# Altium PCB ShieldBoard.PcbDoc
Units mil, origin at the board's own origin, x right, y up, seen from the top; angles counter-clockwise.
Board outline 2700 x 2100 mil, 2 copper layers (Top Layer, Bottom Layer), stack 62.8 mil thick; 15 components, 27 nets, 62 pads, 20 vias.
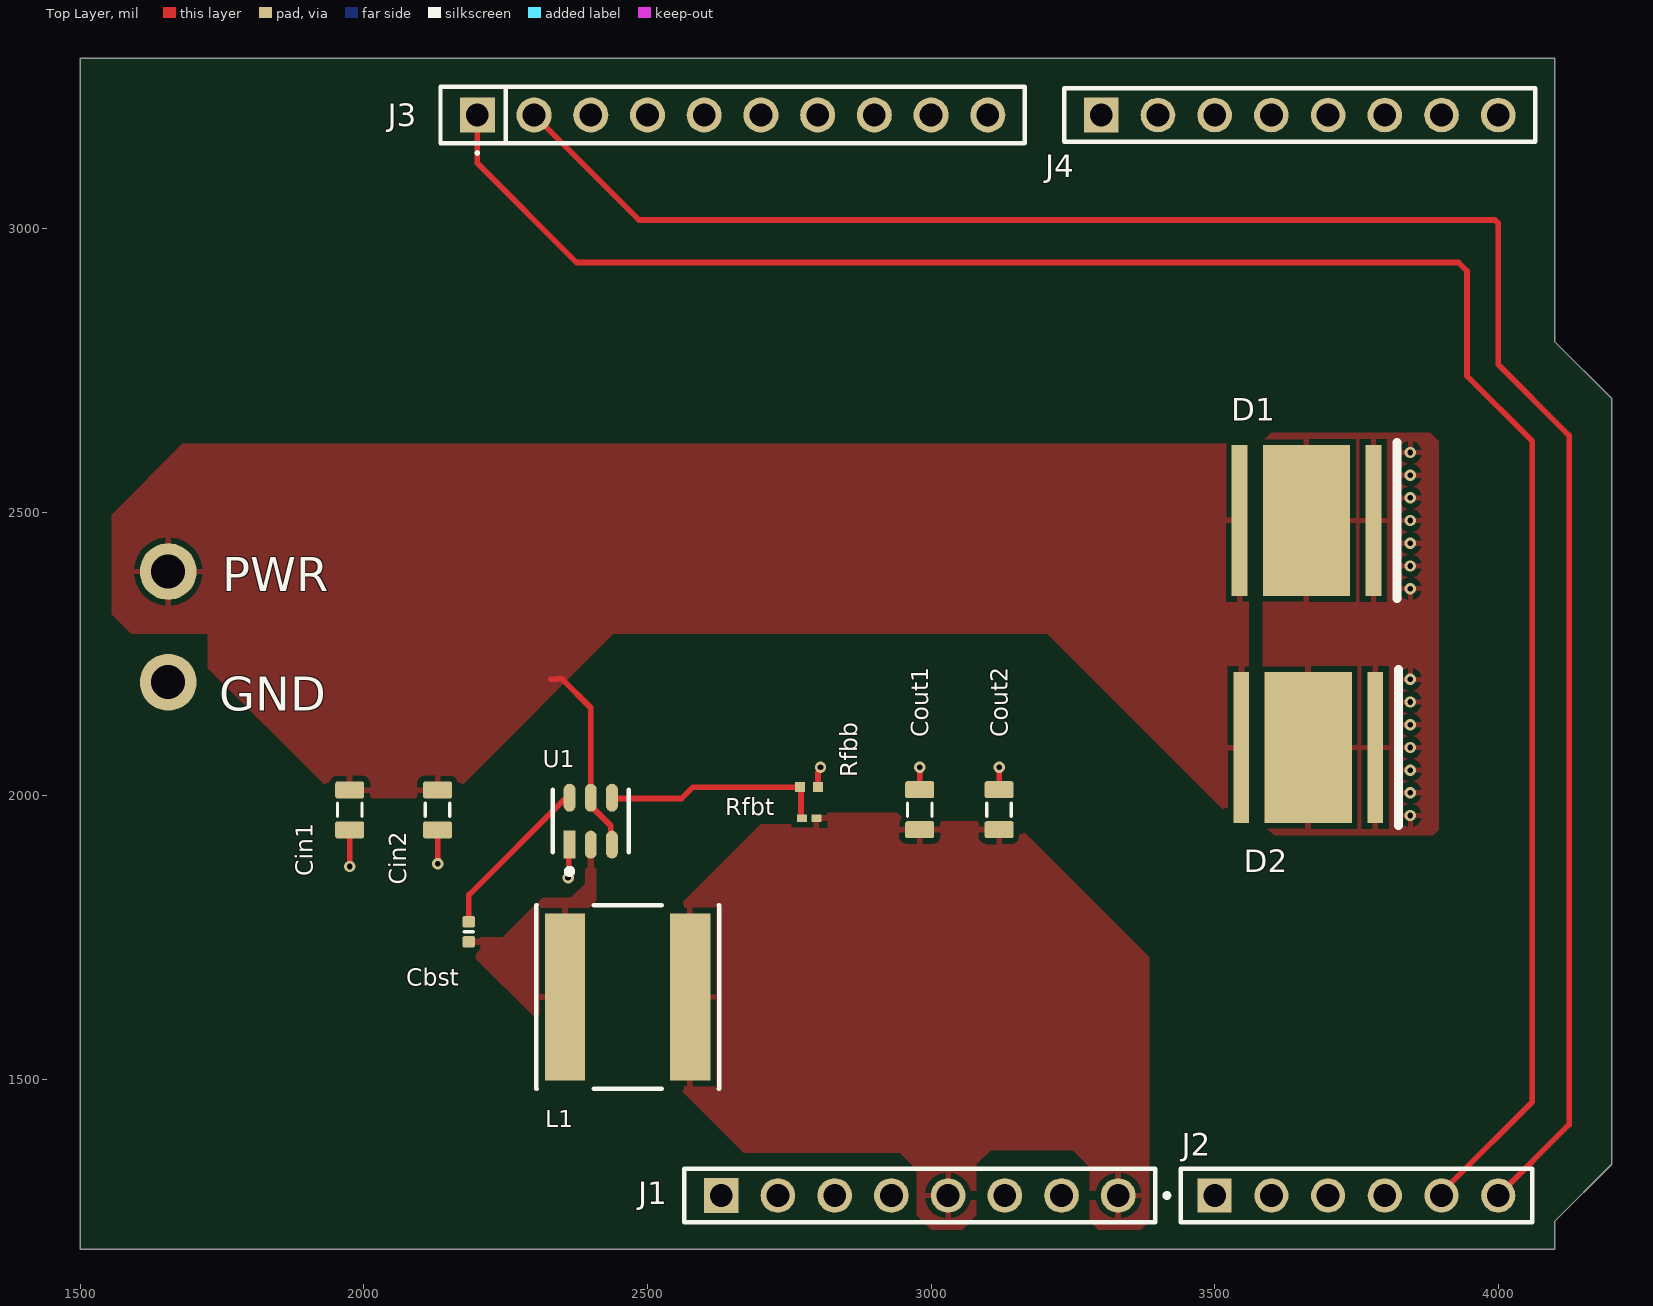
[diagram p0: Top Layer view]
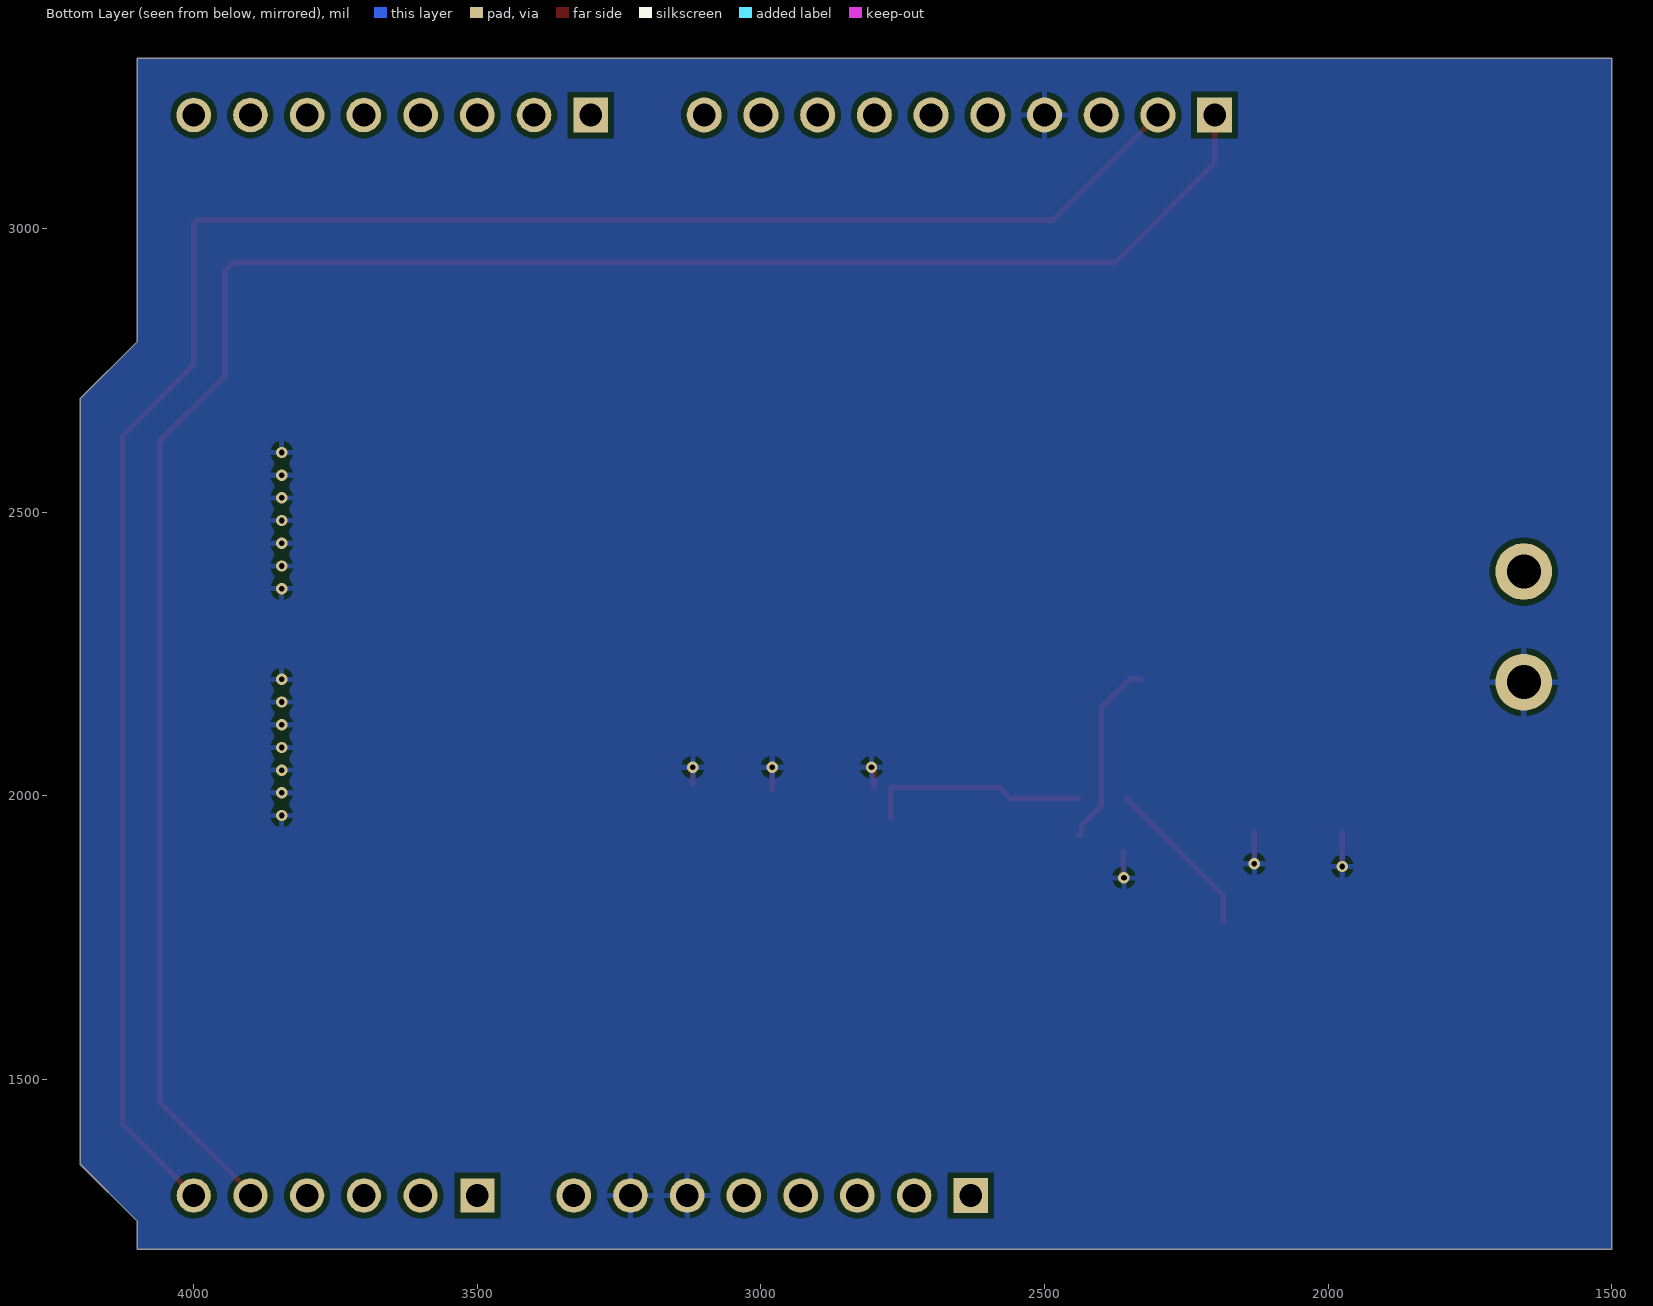
[diagram p1: Bottom Layer view, seen from below]
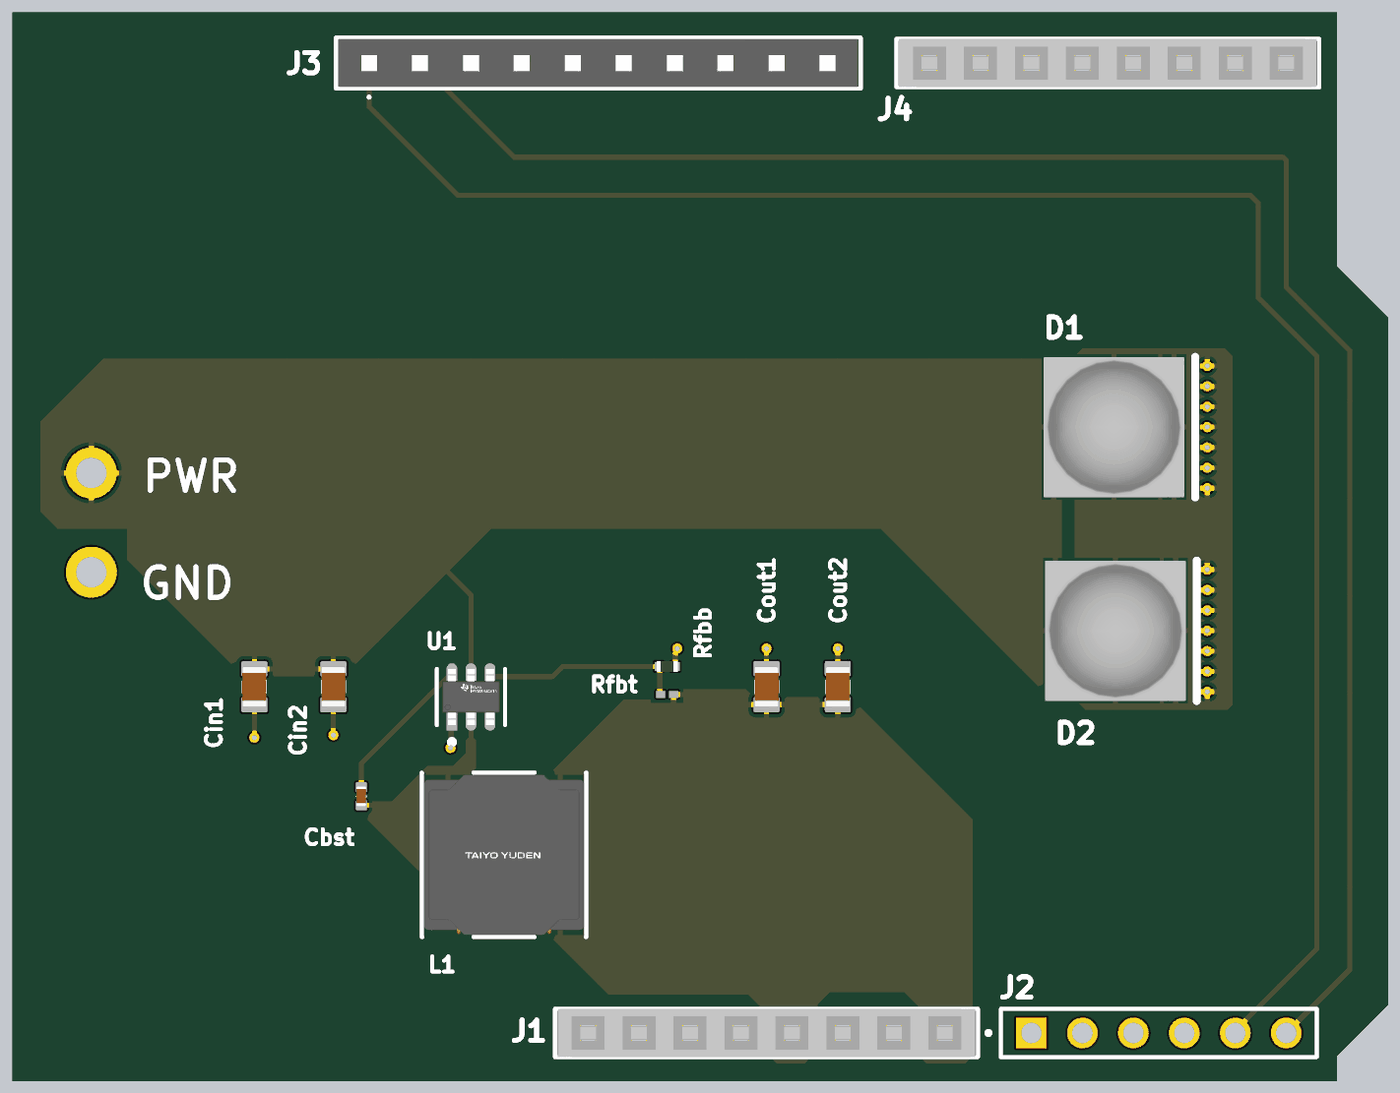
[diagram p2: 3D render of the assembled board from above, using the file's embedded part models]

## Layer stack, top to bottom
Top Solder: solder mask 0.4, Solder Resist, Dk 3.5
Top Layer: signal copper 1.4
Dielectric 1: dielectric 60, FR-4, Dk 4.8
Bottom Layer: signal copper 1.4
Bottom Solder: solder mask 0.4, Solder Resist, Dk 3.5

## Board outline
1500,1200 1500,3300 4100,3300 4100,2800 4200,2700 4200,1350 4100,1250 4100,1200

## Design rules (kind name [scope] priority, off if disabled: settings)
Clearance [All] p1: gap=10 ignorepadtopadclearanceinfootprint=TRUE
MinimumSolderMaskSliver [All] p1: minsoldermaskwidth=5
PolygonConnect [All] p1: connectstyle=Relief reliefconductorwidth=10 reliefentries=4 polygonreliefangle="90 Angle" airgapwidth=10
RoutingVias [All] p1: holewidth=10 width=18 viastyle="Through Hole" minholewidth=6 minwidth=14 maxholewidth=28 maxwidth=50
SilkToSolderMaskClearance [IsPad] p1: minsilkscreentomaskgap=0 clearancetoexposedcopper=TRUE
SolderMaskExpansion [All] p1: expansion=4 istentingtop=FALSE
SupplyNets "Schematic Supply Nets_2" [InNet('+5V')] p1: voltage=0.000
SupplyNets "Schematic Supply Nets_1" [InNet('GND')] p2: voltage=0.000
SupplyNets "Schematic Supply Nets" [InNet('+12V')] p3: voltage=0.000
Width [All] p1: maxlimit=10 minlimit=10 preferedwidth=10
28 further rules are at their usual default settings.

## Components (designator, comment, footprint, x,y, rotation, side; value= is the part's Value field where it differs from the comment)
Cbst "Capacitor 100nF +/-20% 50V 0402" CAPC0402(1005)60_L 2185,1760 r270 top value=100nF
Cin1 "Capacitor 10µF +/-20% 25V 0805" CAPC0805(2012)145_L 1975,1975 r90 top value=10µF
Cin2 "Capacitor 10µF +/-20% 25V 0805" CAPC0805(2012)145_L 2130,1975 r90 top value=10µF
Cout1 "Capacitor 22µF +/-40% 16V 0805" CAPC0805(2012)145_L 2980,1975.04 r270 top value=22µF
Cout2 "Capacitor 22µF +/-40% 16V 0805" CAPC0805(2012)145_L 3120,1975 r270 top value=22µF
D1 "MKRAWT-00-0000-0D0HG235H" CREE-MK-R-2_V 3661.89,2485 r0 top
D2 "MKRAWT-00-0000-0D0HG235H" CREE-MK-R-2_V 3665,2085 r0 top
J1 "SSQ-108-01-G-S" SMTC-SSQ-108-01-X-S 2630,1295 r0 top
J2 "SSQ-106-03-X-S" SAMTEC_SSQ-106-03-X-S 3750,1295 r180 top
J3 "SSQ-110-03-T-S" FP-SSQ-110-03-T-S-MFG 2650,3200 r0 top
J4 "SSQ-108-01-G-S" SMTC-SSQ-108-01-X-S 3300,3200 r0 top
L1 "3.3uH" FP-NRS8030-MFG 2465,1645 r0 top
Rfbb "10kOhm" RESC1005X40X25LL05T05 2785,2015 r180 top
Rfbt "56.2kOhm" RESC0603X28X15NL05T05 2785,1960 r0 top
U1 "TPS562201DDCR" FP-DDC0006A-IPC_C 2400,1955 r90 top

## Footprints (in the part's own frame and the unit in brackets; to place one, negate y for a bottom-side part, rotate by r counter-clockwise, add the part's x,y. Pads: shape width x height; smd on the part's side, far side on the other; paste and mask are expansions set on the pad)
CAPC0402(1005)60_L [mm] "Chip Capacitor, Body 1.0x0.5mm, Height 0.6mm, IPC High Density"
  rrect25% 0.5x0.55 smd: 1(-0.45,0) 2(0.45,0)
  silkscreen extent 0,-0.2 0,0.2, body extent -0.5,-0.25 0.5,0.25, height 0.6
CAPC0805(2012)145_L [mm] "Chip Capacitor, Body 2.0x1.2mm, Height 1.45mm, IPC High Density"
  rrect25% 0.76x1.3 smd: 1(-0.9,0) 2(0.89,0)
  silkscreen extent -0.3,-0.55 0.3,0.55, body extent -1,-0.6 1,0.6, height 1.45
CREE-MK-R-2_V [mm] "SMD, 2-Leads, Body 7x7mm, Thermal Pad 3.9x6.76mm"
  rect 0.7x6.76 smd: 1(-3,0) 2(3,0)
  rect 3.9x6.76 smd: 3(0,0)
  silkscreen extent 4.05,-3.5 4.05,3.5, body extent -3.5,-3.5 3.5,3.5, height 4.1
FP-DDC0006A-IPC_C [mm]
  rect 1.254x0.532 smd paste+0 mask+0: 1(-1.05,0.95)
  rrect100% 1.254x0.532 smd paste+0 mask+0: 2(-1.05,0) 3(-1.05,-0.95) 4(1.05,-0.95) 5(1.05,0) 6(1.05,0.95)
  silkscreen extent -2.37,-1.7 1.4,1.7, body extent -1.78,-1.55 1.78,1.55, height 0.25
FP-NRS8030-MFG [mm]
  rect 1.8x7.5 smd paste+0 mask+0: 1(-2.8,0) 2(2.8,0)
  silkscreen extent -4.1,-4.1 4.1,4.1, body extent -4.2,-4.2 4.2,4.2, height 0.25
FP-SSQ-110-03-T-S-MFG [mm]
  rect 1.57x1.57 hole 1.02: 1(-11.43,0)
  round 1.57 hole 1.02: 2(-8.89,0) 3(-6.35,0) 4(-3.81,0) 5(-1.27,0) 6(1.27,0) 7(3.81,0) 8(6.35,0) 9(8.89,0) 10(11.43,0)
  silkscreen extent -13.08,-1.76 13.08,1.27, body extent -13.18,-1.37 13.18,1.37, height 0.25
RESC0603X28X15NL05T05 [mm] "Chip Resistor, 2-Leads, Body 0.60x0.30mm, IPC Medium Density"
  rect 0.45x0.35 smd: 1(-0.325,0) 2(0.325,0)
  body extent -0.33,-0.17 0.33,0.18, height 0.28
RESC1005X40X25LL05T05 [mm] "Chip Resistor, 2-Leads, Body 1.05x0.55mm, IPC High Density"
  rect 0.45x0.45 smd: 1(-0.4,0) 2(0.4,0)
  body extent -0.53,-0.28 0.53,0.28, height 0.4
SAMTEC_SSQ-106-03-X-S [mm]
  rect 1.53x1.53 / inner round 1.53 / far side rect 1.53x1.53 hole 1.02: 01(6.35,0)
  round 1.53 hole 1.02: 02(3.81,0) 03(1.27,0) 04(-1.27,0) 05(-3.81,0) 06(-6.35,0)
  silkscreen extent -7.88,-1.2 8.59,1.2
SMTC-SSQ-108-01-X-S [mm] "SQ Post Socket, 1x8 Pins, Vertical, 2.54mm Pitch, Female"
  rect 1.55x1.55 hole 1.02: 1(0,0)
  round 1.55 hole 1.02: 2(2.54,0) 3(5.08,0) 4(7.62,0) 5(10.16,0) 6(12.7,0) 7(15.24,0) 8(17.78,0)
  silkscreen extent -1.65,-1.2 19.43,1.2, body extent -1.52,-1.21 19.3,1.21, height 8.51

## Part data
Cbst: library part CMP-001-00067-3, "Chip Capacitor, 100nF +/-20%, 50V, 0402, Thickness 0.6 mm", Case/Package=0402, Max Operating Temperature=85°C, Min Operating Temperature=-55°C, Tolerance=10%, Voltage Rating=50V, Mounting Technology=SMT, Pins=2
Cin1 Cin2: library part CMP-001-00079-4, "Chip Capacitor, 10µF +/-20%, 25V, 0805, Thickness 1.45 mm", Case/Package=0805, Max Operating Temperature=85°C, Min Operating Temperature=-55°C, Tolerance=10%, Voltage Rating=25V, Mounting Technology=SMT, Pins=2
Cout1 Cout2: library part CMP-001-00081-4, "Chip Capacitor, 22µF +/-40%, 16V, 0805, Thickness 1.45 mm", Case/Package=0805, Max Operating Temperature=85°C, Min Operating Temperature=-55°C, Tolerance=5%, Voltage Rating=16V, Mounting Technology=SMT, Pins=2
D1 D2: library part CMP-2100-00977-1, "LED, White, 12 V, 2-Pin SMD, RoHS, Tape and Reel"
J1 J4: library part CMP-1023-00292-1, "SQ Post Socket, Through-hole, Vertical, -55 to 125 degC, 2.54 mm Pitch, 8-Pin, Female, RoHS", Manufacturer=Samtec, Temperature Range="-55 to 125 degC", ComponentLink1Description="Manufacturer URL", ComponentLink1URL=http://www.samtec.com, ComponentLink2Description=Datasheet, ComponentLink2URL=http://www.samtec.com/documents/webfiles/pdf/SSQ_TH.PDF, ComponentLink3Description="Package Specification", ComponentLink3URL=http://www.samtec.com/documents/webfiles/cpdf/SSQ-1XX-XX-XXX-X-XX-XXX-XX-X-MKT.pdf, DatasheetVersion=F-214, Mounting Technology=Through-hole, Orientation=Vertical, PackageDescription="Assembly, Socket Strip .025[0.64] SQ Tail", PackageReference=SSQ-108-01-X-S, PackageVersion="BD, 6/1987", PartNumber=SSQ-108-01-G-S, Pitch="2.54 mm", RoHS=True
J2: "SSQ - Samtec 2.54mm Square Tail Single Row Socket Strip 8.5mm Profile - Fast Stock", Package=None, Check_prices=https://www.snapeda.com/parts/SSQ-106-03-T-S/Samtec+Inc./view-part/?ref=eda, MF="Samtec Inc.", MP=SSQ-106-03-T-S, SnapEDA_Link=https://www.snapeda.com/parts/SSQ-106-03-T-S/Samtec+Inc./view-part/?ref=snap
J3: library part CMP-00575-00295916-2, "SSQ-110-03-T-S Headers & Wire Housings Tiger Buy Socket Strip with Square Tails, 0.100 Pitch", Color=Black, Current Rating=6.3A, Manufacturer Lifecycle Status=PRODUCTION, Max Operating Temperature=105°C, Min Operating Temperature=-55°C, Voltage Rating=655V, Voltage Rating (AC)=465V, Connector Type="Receptacle, Socket", Contact Material="Nickel, Tin", Contact Plating=Tin, Height=8.64mm, Housing Color=Black, Housing Material=Plastic, Lead Free="Lead Free", Length=25.9mm, Lifecycle Status=Production, Mount="Through Hole", Number of Contacts=10, Number of Pins=10, Number of Positions=10, Number of Rows=1, Packaging=Bulk, Pitch=2.54mm, Radiation Hardening=No, RoHS=Compliant, Termination=Solder, Voltage Rating (DC)=655V, Width=2.41mm
L1: library part CMP-14484-000405-1, "Inductor Power Shielded Wirewound 3.3uH 20% 100KHz Ferrite 4.2A 24.7mΩ DCR T/R", Case/Package=Nonstandard, Current Rating=4.3A, DC Resistance (DCR)=19mR, Inductance Tolerance=20%, Max DC Current=4.2A, Max Operating Temperature=125°C, Min Operating Temperature=-25°C, Package Quantity=1000, Resistor Type=Wirewound, Self Resonant Frequency=50MHz, Test Frequency=100kHz, Core Material=Ferrite, Depth=8.2mm, Halogen Free="Halogen Free", Height=3mm, Height - Seated (Max)=0.118inch, Inductance=3.3uH, Lead Free="Lead Free", Lead Pitch=5.6mm, Length=8mm, Mount="Surface Mount", Number of Pins=2, Packaging="Tape and Reel", Radiation Hardening=No, REACH SVHC="No SVHC", RMS Current (Irms)=4.3A, RoHS Compliant=Yes, Saturation Current=4.2A, Series=NRS, Shielding=Shielded, Termination=SMD/SMT, Tolerance=20%, Width=0.315inch
Rfbb: library part CMP-2000-07588-1, "Chip Resistor, 10 KOhm, +/- 1%, 0.1 W, -55 to 155 degC, 0402 (1005 Metric), RoHS, Tape and Reel", Case Code (Imperial)=0402, Case Code (Metric)=1005, Manufacturer=Panasonic, Max Operating Temperature=155degC, Max Power Dissipation=100mW, Min Operating Temperature=-55degC, Package Description="2-Pin Surface Mount Device, Body 1 x 0.5 mm", Package Quantity=1, Package Reference=402, Resistance=10KOhm, Temperature Coefficient=100ppm\/degreesC, Tolerance=1%, Voltage Rating=50V, Case\/Package=0402, Composition=ThickFilm, Contact Plating=Tin, Datasheet URL=https://industrial.panasonic.com/cdbs/www-data/pdf/RDA0000/AOA0000C304.pdf, Datasheet Version=02/2017, Depth=0.5mm, Height=0.35mm, Lead Free=LeadFree, Length=1mm, Manufacturer URL=http://www.panasonic.com/, Military Standard=Not, Mount=SurfaceMount, Mounting Technology=SurfaceMount, Number of Pins=2, Number of Terminations=2, Packaging=TapeandReel, Power Rating=100mW, Radiation Hardening=No, REACH SVHC=NoSVHC, RoHSCompliant=True, Termination=SMD/SMT, Voltage Rating (DC)=50V, Width=0.02inch
Rfbt: library part CMP-2004-00723-1, Manufacturer="Vishay Dale", Part Number=CRCW020156K2FNED
U1: library part CMP-04918-000361-1, "IC REG BUCK ADJ 2A TSOT23-6", Case/Package=SOT, Max Input Voltage=17V, Max Operating Temperature=125°C, Max Output Current=2A, Min Input Voltage=4.5V, Min Operating Temperature=-40°C, Output Voltage=7V, Quiescent Current=400uA, Switching Frequency=580kHz, Contact Plating=Tin, Lead Free="Lead Free", Mount="Surface Mount", Number of Outputs=1, Number of Pins=6, Operating Supply Voltage=17V, Output Type=Adjustable, RoHS Compliant=Yes

## Free pads (board coordinates)
  round 100 hole 60: 2(1655,2395) 3(1655,2200)

## Via types
v1: diameter 20, hole 10, Top Layer to Bottom Layer, 20 vias

## Nets (pads, with @x,y where several pads share a name; then routed paths per layer and width w, separated by ;. In a path a pad name is that pad's centre, name@x,y a point inside that pad or via, vN(x,y) a via of type N, cw(c..) or ccw(c..) an arc to the next point about the centre after c; other vN are vias at no path point)
3.3V: J1.4
+5V: Cout1.2 Cout2.2 J1.5 J1.8 L1.2 Rfbt.2
+12V: Cin1.2 Cin2.2 D1.1 D2.1 pad.2 U1.3 U1.5 | length 334
  Top Layer w10: 2330,2205 2340,2205 2340.86,2205.86 2349.14,2205.86 2400,2155 U1.5 2400,1982.13 2435.31,1946.83 2435.31,1932.93 2438.23,1930 U1.3@2440,1930
A4: J2.05 J3.1 | length 3626.4
  Top Layer w10: J3.1 2200,3115 2375,2940 3930,2940 3945,2925 3945,2740 4060,2625 4060,1460 J2.05@3915,1315
A5: J2.06 J3.2 | length 3601.8
  Top Layer w10: J3.2 2485,3015 3994.14,3015 4000,3009.14 4000,2760 4125,2635 4125,1420 J2.06 J2.06@3995,1295
AREF: J3.8
D0: J4.8
D1: J4.7
D2: J4.6
D3: J4.5
D4: J4.4
D5: J4.3
D6: J4.2
D7: J4.1
D8: J3.10
D9: J3.9
D10: J3.3
D11: J3.7
D12: J3.5
D13: J3.6
GND: Cin1.1 Cin2.1 Cout1.1 Cout2.1 D1.2 D1.3 D2.2 D2.3 J1.6 J1.7 J3.4 pad.3 Rfbb.1 U1.1 | length 259.5
  Top Layer w10: v1(1975,1875) Cin1.1@1975,1935 ; v1(2130,1880) Cin2.1@2130,1935 ; v1(2360,1855) 2361.3,1856.3 2361.3,1898.7 U1.1@2360,1900 ; Rfbb.1 2800.75,2040.75 ; v1@2805,2047.29 v1(2805,2050) ; Cout1.1@2980,2010 v1(2980,2050) ; Cout2.1@3120,2020 v1(3120,2050)
  other v1: 3845,1965 3845,2005 3845,2045 3845,2085 3845,2125 3845,2165 3845,2205 3845,2365 3845,2405 3845,2445 3845,2485 3845,2525 3845,2565 3845,2605
IOREF: J1.2
N-C: J1.1
NetCbst_1: Cbst.1 U1.6 | length 287.7
  Top Layer w10: Cbst.1 2185,1825 U1.6@2355,1995
NetRfbb_2: Rfbb.2 Rfbt.1 U1.4 | length 393.4
  Top Layer w10: U1.4@2440,1995 2560,1995 2580,2015 Rfbb.2 2770.73,2013.52 2770.73,1960.73 Rfbt.1@2770,1960
RESET: J1.3
"SW OUT": Cbst.2 L1.1 U1.2
pads on no net: J2.01 J2.02 J2.03 J2.04

## Polygon pours and split planes (outlines as drawn)
"SW OUT" on Top Layer "SW_OUT_L01_P007" (solid, pour order 7): 2175,1750 2175,1735 2320,1590 2320,1495 2390,1495 2395,1500 2390,1505 2390,1795 2410,1815 2410,1930 2390,1930 2390,1845 2365,1820 2315,1820 2245,1750
+5V on Top Layer "+5V_L01_P005" (solid, pour order 5): 2540,1500 2670,1370 2945,1370 2975,1340 2975,1260 3000,1235 3055,1235 3080,1260 3080,1350 3105,1375 3250,1375 3280,1345 3280,1250 3295,1235 3370,1235 3385,1250 3385,1715 3145,1955 2955,1955 2940,1970 2785,1970 2785,1950 2700,1950 2540,1790
+12V on Top Layer "+12V_L01_P006" (solid, pour order 6): 1555,2495 1555,2320 1590,2285 1725,2285 1725,2225 1955,1995 2150,1995 2440,2285 3205,2285 3535,1955 3560,1955 3560,2615 3555,2620 1680,2620 1560,2500
GND on Top Layer "GND_L01_P001" (solid, pour order 1): 3585,1950 3605,1930 3885,1930 3895,1940 3895,2625 3880,2640 3600,2640 3585,2625
GND on Bottom Layer "GND_L02_P000" (solid, pour order 0): 1500,1200 4100,1200 4100,1250 4200,1350 4200,2700 4100,2800 4100,3300 1500,3300

## Silkscreen, mask and mechanical layers (free items; w line width, h text height)
Top Overlay:
  text "PWR" at 1750,2360 h60
  text "GND" at 1745,2150 h60
Mechanical 1:
  lines w10: 8740,3710 8740,3805 ; 1500,1200 4100,1200 4100,1215 4100,1250 4200,1350 4200,2700 4100,2800 4100,3300 1500,3300 1500,1200